# Altium PCB STM_32_C.PcbDoc
Units mm, origin at the board's own origin, x right, y up, seen from the top; angles counter-clockwise.
Board outline 49.75 x 49.75 mm, 2 copper layers (Top Layer, Bottom Layer); 39 components, 26 nets, 190 pads, 0 vias.
Unrouted connection lines stored in the file: 111.
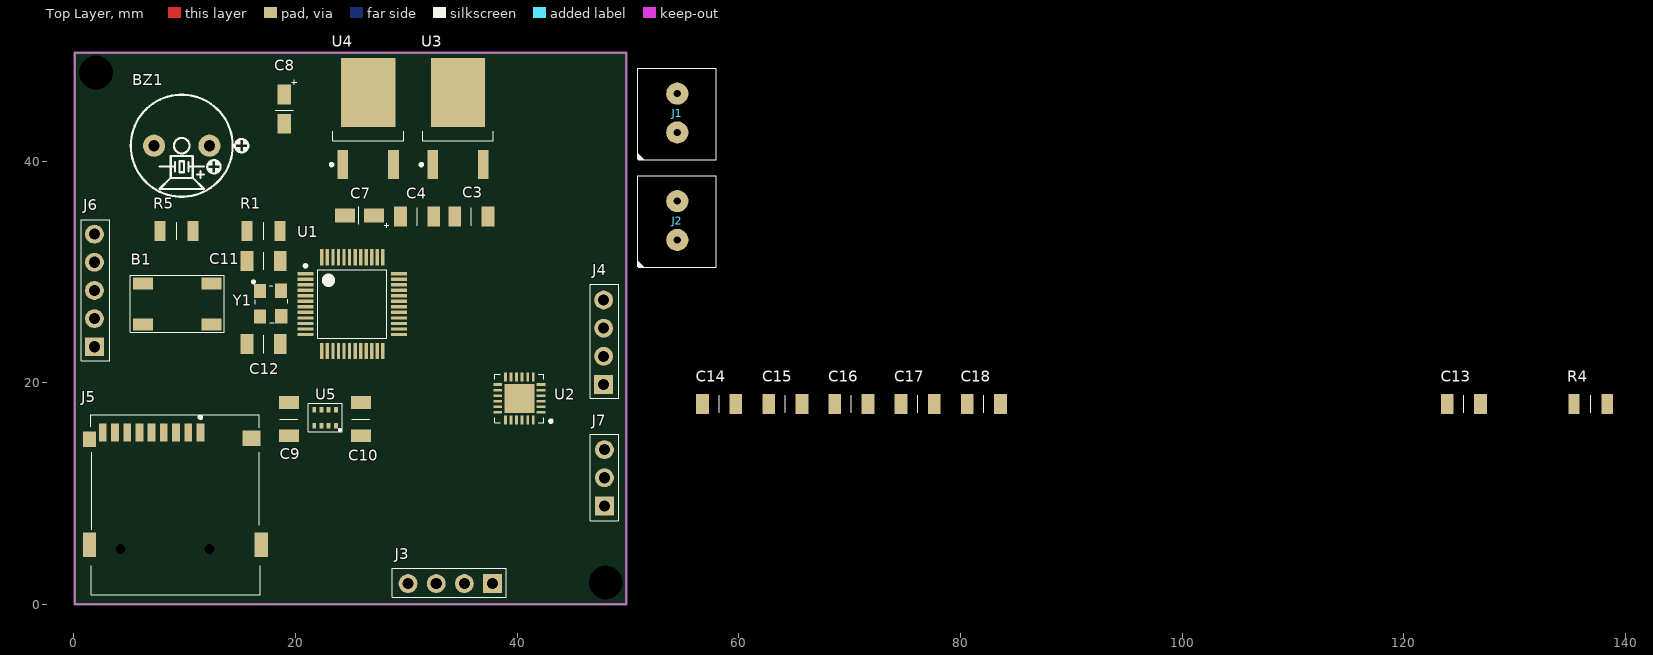
[diagram p0: Top Layer view]
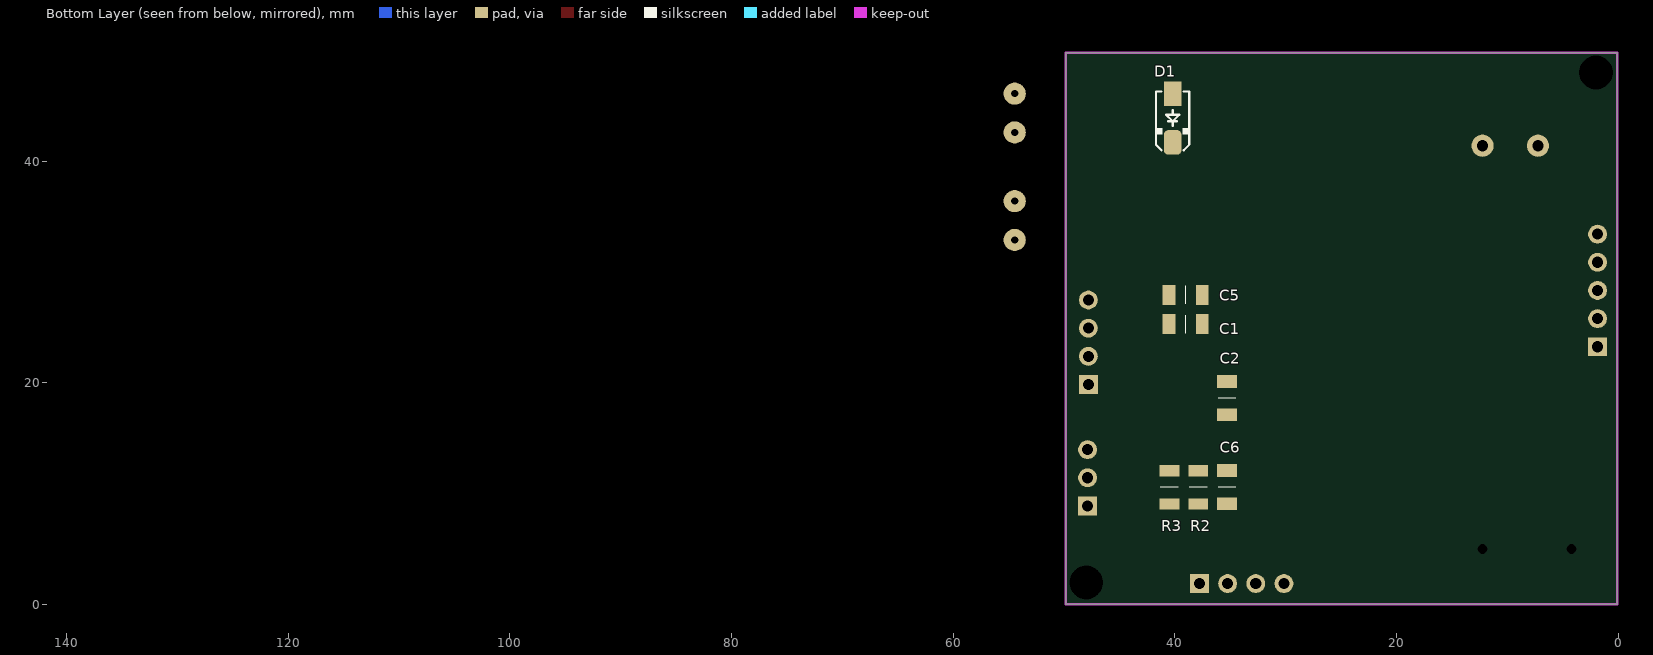
[diagram p1: Bottom Layer view, seen from below]

## Layer stack, top to bottom
Top Solder: solder mask 0.0102, Solder Resist, Dk 3.5
Top Layer: signal copper 0.0356
Dielectric 1: dielectric 0.32, FR-4, Dk 4.8
Bottom Layer: signal copper 0.0356
Bottom Solder: solder mask 0.0102, Solder Resist, Dk 3.5

## Board outline
0.094,0.039 49.84,0.039 49.84,49.785 0.094,49.785

## Design rules (kind name [scope] priority, off if disabled: settings)
Clearance [All] p1: gap=0.254 ignorepadtopadclearanceinfootprint=FALSE except(0: Arc-Hole Track-Hole SMDPad-Hole THPad-Hole Via-Hole Fill-Hole Poly-Hole Region-Hole Text-Hole)
PolygonConnect [All] p1: connectstyle=Relief reliefconductorwidth=0.254 reliefentries=4 polygonreliefangle="90 Angle" airgapwidth=0.254
RoutingVias [All] p1: holewidth=0.711 width=1.27 viastyle="Through Hole" minholewidth=0.711 minwidth=1.27 maxholewidth=0.711 maxwidth=1.27
SolderMaskExpansion [All] p1: expansion=0.102 istentingtop=FALSE
Width [All] p1: maxlimit=2 minlimit=0.152 preferedwidth=0.35 minimp=50.000000 maximp=50.000000 favimp=50.000000
30 further rules are at their usual default settings.

## Components (designator, comment, footprint, x,y, rotation, side; value= is the part's Value field where it differs from the comment)
B1 "Push Button" "PUSB BUTTON-SMD" 6.243,28.969 r0 top
BZ1 "BUZZER" BZ_C9 9.743,41.4 r180 top
C1 "0.1 uF C1206" C1206 38.45,24.8 r0 bottom
C2 "0.1 uF C1206" C1206 34.8,19.2 r270 bottom
C3 "0.1 uF C1206" C1206 35.303,35.5 r0 top
C4 "330 nF C1206" C1206 30.4,35.5 r0 top
C5 "0.1 uF C1206" C1206 38.45,27.45 r0 bottom
C6 "2.2 nF c1206" C1206 35.8,10.025 r90 bottom
C7 "10 uF - Tantal" "C1206- TANTAL" 25.7,35.1 r180 top
C8 "10 uF - Tantal" "C1206- TANTAL" 19,44.6 r270 top
C9 "0.1 uF C1206" C1206 19.9,17.3 r270 top
C10 "0.1 uF C1206" C1206 26.4,17.3 r270 top
C11 "16 pF" C1206 16.55,31.5 r0 top
C12 "16 pF" C1206 17.7,23 r180 top
C13 "0.1 uF C1206" C1206 124.828,18.605 r0 top
C14 "0.1 uF C1206" C1206 57.645,18.605 r0 top
C15 "0.1 uF C1206" C1206 63.614,18.605 r0 top
C16 "0.1 uF C1206" C1206 69.583,18.605 r0 top
C17 "0.1 uF C1206" C1206 75.552,18.605 r0 top
C18 "0.1 uF C1206" C1206 81.521,18.605 r0 top
D1 "1N4007" D_SMA 40.2,43.9 r270 bottom
J1 "Klemens 1x2 3.5mm" "KLEMENS 1X2 - 3.5MM" 54.4,44.2 r90 top
J2 "Klemens 1x2 3.5mm" "KLEMENS 1X2 - 3.5MM" 54.4,34.5 r90 top
J3 "Header 2.54 1x4" "HEADER 2.54 1X4" 37.28,1.175 r180 top
J4 "Header 2.54 1x4" "HEADER 2.54 1X4" 47.075,20.36 r90 top
J5 "Micro SD Card Holder" "MICRO SD CARD HOLDER" 8.743,8.444 r0 top
J6 "Header 2.54 1x5" "HEADER 2.54 1X5" 1.868,23.264 r90 top
J7 "Header 2.54 1x3" "HEADER 2.54 1X3" 47.85,8.904 r90 top
R1 "10K R1206" "R1206 RESıSTOR" 17.2,33.7 r180 top
R2 "4.7K R1206" "R1206 RESıSTOR" 37.892,10.5 r90 bottom
R3 "4.7K R1206" "R1206 RESıSTOR" 40.5,10.5 r90 bottom
R4 "10K R1206" "R1206 RESıSTOR" 136.766,18.097 r0 top
R5 "10K R1206" "R1206 RESıSTOR" 9.2,33.7 r0 top
U1 "LQFP48-STM32" LQFP48-STM32 25.133,27.114 r0 top
U2 "QFN24-MPU6050" QFN50P400X400X90_HS-25N_MPU6050_GYRO 40.2,18.6 r180 top
U3 "L7805-DPAK" DPAK-L7805-LD108633 34.668,43.844 r90 top
U4 "LD108633 DPAK" DPAK-L7805-LD108633 26.568,43.844 r90 top
U5 "BMP280" ? 24,15.765 r0 top
Y1 "8 MHz 12.5 pf Osc" "8 MHZ OSC." 17.299,27.314 r270 top

## Footprints (in the part's own frame and the unit in brackets; to place one, negate y for a bottom-side part, rotate by r counter-clockwise, add the part's x,y. Pads: shape width x height; smd on the part's side, far side on the other; paste and mask are expansions set on the pad)
"8 MHZ OSC." [mm]
  rect 1.3x1.1 smd mask+0.05: 1(-0.981,-0.49) 2(1.319,-0.49) 3(1.303,1.417) 4(-0.986,1.401)
  silkscreen extent -1.91,-1.19 1.88,2.01, body extent -1.38,-0.64 1.82,1.86, height 1.22
BZ_C9 [mm] "BUZZER 9mm DIA, 7.62mm pitch"
  round 2 hole 1: 1(-2.5,0) 2(2.5,0)
  silkscreen extent -6,-4.6 4.6,4.6, body extent -4.55,-4.55 4.55,4.55, height 5.6
C1206 [mm]
  rect 1.15x1.8 smd mask+0.05: 1(-0.925,-0.5) 2(2.075,-0.5)
  silkscreen extent 0.58,-1.3 0.58,0.31, body extent -1.02,-1.3 2.18,0.3, height 1
"C1206- TANTAL" [mm]
  rect 1.8x1.23 smd mask+0.05: 1(-1.4,0) 1(-1.4,0) 2(1.22,0)
  silkscreen extent -2.74,-0.8 0,1.1, body extent -1.7,-0.8 1.5,0.8, height 1.62
D_SMA [mm] "SMA Molded Diode, 2-Leads, Body 4.3x2.7mm, SOD-128"
  rect 2.2x1.6 smd: 1(-2.2,0)
  rrect50% 2.2x1.6 smd: 2(2.2,0)
  silkscreen extent -2.4,-1.5 2.9,1.5, body extent -2.75,-1.4 2.75,1.4, height 2.6
DPAK-L7805-LD108633 [mm] "L7805 5V Regulator"
  rect 2.6x0.95 smd: 1(-4.15,2.28) 2(-4.15,-2.28)
  rect 6.2x4.9 smd: 3(2.35,0)
  silkscreen extent -4.27,-3.2 -1.15,3.43, body extent -4.27,-3.2 5.45,3.2, height 2.8
"HEADER 2.54 1X3" [mm]
  rect 1.7x1.7 hole 1 mask+0.05: 1(0,-0.025)
  round 1.7 hole 1 mask+0.05: 2(2.54,-0.025) 3(5.08,-0.025)
  silkscreen extent -1.33,-1.3 6.45,1.28, body extent -1.26,-1.27 6.36,1.23, height 9.1
"HEADER 2.54 1X4" [mm]
  rect 1.7x1.7 hole 1 mask+0.05: 1(-0.5,-0.725)
  round 1.7 hole 1 mask+0.05: 2(2.04,-0.725) 3(4.58,-0.725) 4(7.12,-0.725)
  silkscreen extent -1.73,-2.1 8.52,0.5, body extent -1.68,-2.05 8.48,0.45, height 9.1
"HEADER 2.54 1X5" [mm]
  rect 1.7x1.7 hole 1 mask+0.05: 1(0,0)
  round 1.7 hole 1 mask+0.05: 2(2.54,0) 3(5.08,0) 4(7.62,0) 5(10.16,0)
  silkscreen extent -1.28,-1.37 11.48,1.2, body extent -1.25,-1.3 11.45,1.2, height 9.1
"KLEMENS 1X2 - 3.5MM" [mm]
  round 2 hole 0.65: 1(-1.6,-0.05) 2(1.9,-0.05)
  silkscreen extent -4.11,-3.58 4.2,3.58, body extent -3.9,-3.45 4.09,3.55, height 8.9
LQFP48-STM32 [mm] "TSQFP, 48-Leads, Body 7.00x7.00mm, Pitch 0.50mm, IPC Medium Density"
  rect 1.45x0.3 smd mask+0.05: 1(-4.225,2.75) 2(-4.225,2.25) 3(-4.225,1.75) 4(-4.225,1.25) 5(-4.225,0.75) 6(-4.225,0.25) 7(-4.225,-0.25) 8(-4.225,-0.75) 9(-4.225,-1.25) 10(-4.225,-1.75) 11(-4.225,-2.25) 12(-4.225,-2.75) 25(4.225,-2.75) 26(4.225,-2.25) 27(4.225,-1.75) 28(4.225,-1.25) 29(4.225,-0.75) 30(4.225,-0.25) 31(4.225,0.25) 32(4.225,0.75) 33(4.225,1.25) 34(4.225,1.75) 35(4.225,2.25) 36(4.225,2.75)
  rect 0.3x1.45 smd mask+0.05: 13(-2.75,-4.225) 14(-2.25,-4.225) 15(-1.75,-4.225) 16(-1.25,-4.225) 17(-0.75,-4.225) 18(-0.25,-4.225) 19(0.25,-4.225) 20(0.75,-4.225) 21(1.25,-4.225) 22(1.75,-4.225) 23(2.25,-4.225) 24(2.75,-4.225) 37(2.75,4.225) 38(2.25,4.225) 39(1.75,4.225) 40(1.25,4.225) 41(0.75,4.225) 42(0.25,4.225) 43(-0.25,4.225) 44(-0.75,4.225) 45(-1.25,4.225) 46(-1.75,4.225) 47(-2.25,4.225) 48(-2.75,4.225)
  silkscreen extent -4.35,-3.1 3.1,3.57, body extent -4.5,-4.5 4.5,4.5, height 1.6
"MICRO SD CARD HOLDER" [mm]
  rect 0.7x1.6 smd paste+0 mask+0: 1(2.684,7.075) 2(1.584,7.075) 3(0.484,7.075) 4(-0.616,7.075) 5(-1.716,7.075) 6(-2.816,7.075) 7(-3.916,7.075) 8(-5.016,7.075) Cd(-6.116,7.075)
  rect 1.2x1.4 smd paste+0 mask+0: 10(-7.316,6.475)
  rect 1.6x1.4 smd paste+0 mask+0: 11(7.284,6.575)
  rect 1.2x2.2 smd paste+0 mask+0: 12(-7.316,-3.025) 13(8.184,-3.025)
  round 0 hole 0.9 unplated paste-1000 mask+0: ""(-4.516,-3.425) ""(3.484,-3.425)
  silkscreen extent -7.22,-7.55 8.08,8.7, body extent -7.57,-7.42 8.43,7.83, height 1.85
"PUSB BUTTON-SMD" [mm]
  rect 1.8x1.1 smd mask+0.05: 1(0,0) 2(6.2,0) 3(0,-3.7) 4(6.2,-3.7)
  silkscreen extent -1.15,-4.4 7.35,0.75, body extent -0.2,-4.5 6.2,0.7, height 1.5
QFN50P400X400X90_HS-25N_MPU6050_GYRO [mm] "QFN, 24-Leads, Body 4.00x4.00mm, Pitch 0.50mm, Thermal Pad 2.70x2.60mm, IPC Medium Density"
  rect 0.8x0.25 smd mask+0.05: 1(-1.95,1.25) 2(-1.95,0.75) 3(-1.95,0.25) 4(-1.95,-0.25) 5(-1.95,-0.75) 6(-1.95,-1.25) 13(1.95,-1.25) 14(1.95,-0.75) 15(1.95,-0.25) 16(1.95,0.25) 17(1.95,0.75) 18(1.95,1.25)
  rect 0.25x0.8 smd mask+0.05: 7(-1.25,-1.95) 8(-0.75,-1.95) 9(-0.25,-1.95) 10(0.25,-1.95) 11(0.75,-1.95) 12(1.25,-1.95) 19(1.25,1.95) 20(0.75,1.95) 21(0.25,1.95) 22(-0.25,1.95) 23(-0.75,1.95) 24(-1.25,1.95)
  rect 2.7x2.6 smd mask+0.05: 25(0,0)
  silkscreen extent -2.98,-2.2 2.2,2.2, body extent -2.07,-2.07 2.07,2.07, height 0.9
"R1206 RESıSTOR" [mm]
  rect 1x1.8 smd mask+0.05: 1(-1.425,0) 2(1.575,0)
  silkscreen extent 0.08,-0.8 0.08,0.81, body extent -1.52,-0.8 1.68,0.81, height 0.55
? [mm]
  rect 0.35x0.5 smd mask+0.05: 1(-0.35,0.385) 1(-0.35,0.385) 1(-0.35,0.385) 1(-0.35,0.385) 1(-0.35,0.385) 1(-0.35,0.385) 2(-1,0.385) 3(-1.65,0.385) 4(-2.3,0.385) 5(-2.3,1.835) 6(-1.65,1.835) 7(-1,1.835) 8(-0.35,1.835) 8(-0.35,1.835)
  silkscreen extent -2.85,-0.16 0.21,2.38, body extent -2.57,0.11 -0.07,2.11, height 0.95

## Part data
B1: "Smd Push Button", Satın Alma Linki=https://urun.n11.com/diger/mini-pushbutton-switch-smd-P227461537?gclid=Cj0KCQjwkoDmBRCcARIsAG3xzl8Y_-jeD7HocNM6lvuZ_rVp83568XPGtNzlPwXWLph8oCRqo0yh87UaApZYEALw_wcB&gclsrc=aw.ds
BZ1: library part BUZZER_C9, "Buzzer, 9mm, Magnetic Transducer", MANF=Mallory, MANF_P#=PB-09N23P-03Q, PARAM=2.7KHz, PARAM2="3V, 30mA", PRICE=$3
D1: library part DIODE_SMD_1N4007, "DIODE, GENERAL PURPOSE, 1000V/1A", ASSEMBLY=ASSEMBLY, DESC=DESCRIPTION, MANF=Kingtronics, MANF_P#=M7, PARAM="1000V VRRM", PARAM2=1A, PRICE=PRICE
U1: "STM32f101 48 Pins MICROCONTROLLER"
U2: "MPU6050_GYRO"
U3: "L7805 5V REGULATOR SMD Pack_3 Pins"
U4: "SMD,LD108633 DPAK 3.3V REGULATOR"
U5: "BMP280 SENSOR"

## Free pads (board coordinates)
  round 1.524 hole 3.048: 15(48,2)
  round 1.524 hole 3.048 unplated: 16(2,48)

## Nets (pads, with @x,y where several pads share a name; then routed paths per layer and width w, separated by ;. In a path a pad name is that pad's centre, name@x,y a point inside that pad or via, vN(x,y) a via of type N, cw(c..) or ccw(c..) an arc to the next point about the centre after c; other vN are vias at no path point)
3V3: C1.1 C2.1 C8.1 C9.1 C10.1 C14.2 C15.2 C16.2 C17.2 C18.2 J3.4 J5.4 J6.1 R2.1 R3.1 R4.2 R5.2 U1.1 U1.9 U1.24 U1.36 U1.48 U2.8 U2.13 U4.3 U5.6 U5.8
5V: C3.2 C7.1 J2.2 J4.1 J7.2 U3.2 U4.2
9V: C4.1 D1.2 U3.1
GND: B1.3 BZ1.2 C1.2 C2.2 C3.1 C4.2 C5.1 C6.2 C7.2 C8.2 C9.2 C10.2 C11.2 C13.2 C14.1 C15.1 C16.1 C17.1 C18.1 J1.1 J2.1 J3.3 J4.2 J5.6 J5.10 J5.11 J5.12 J5.13 J6.5 J7.3 R1.2 R5.1 U1.8 U1.23 U1.35 U1.47 U2.1 U2.9 U2.11 U2.18 U3.3 U4.1 U5.1 U5.7 Y1.2 Y1.4
NetB1_1: B1.1 C13.1 J6.4 R4.1 U1.7
NetBZ1_1: BZ1.1 U1.43
NetC5_2: C5.2 U2.10
NetC6_1: C6.1 U2.20
NetC11_1: C11.1 U1.5 Y1.1
NetC12_1: C12.1 U1.6 Y1.3
NetD1_1: D1.1 J1.2
NetJ3_1: J3.1 U1.13
NetJ3_2: J3.2 U1.12
NetJ4_3: J4.3 U1.30
NetJ4_4: J4.4 U1.29
NetJ5_2: J5.2 U1.14
NetJ5_3: J5.3 U1.17 U5.3
NetJ5_5: J5.5 U1.15 U5.4
NetJ5_7: J5.7 U1.16 U5.5
NetJ6_2: J6.2 U1.34
NetJ6_3: J6.3 U1.37
NetJ7_1: J7.1 U1.40
NetR1_1: R1.1 U1.44
NetR2_2: R2.2 U1.21 U2.23
NetR3_2: R3.2 U1.22 U2.24
NetU1_26: U1.26 U5.2
pads on no net: B1.2 B1.4 C12.2 J5. J5.1 J5.8 J5.Cd U1.2 U1.3 U1.4 U1.10 U1.11 U1.18 U1.19 U1.20 U1.25 U1.27 U1.28 U1.31 U1.32 U1.33 U1.38 U1.39 U1.41 U1.42 U1.45 U1.46 U2.2 U2.3 U2.4 U2.5 U2.6 U2.7 U2.12 U2.14 U2.15 U2.16 U2.17 U2.19 U2.21 U2.22 U2.25

## Keep-outs
Keep-Out Layer:
  the board outline again, w0.254